# EAGLE board V1.1 (EAGLE 5.09)
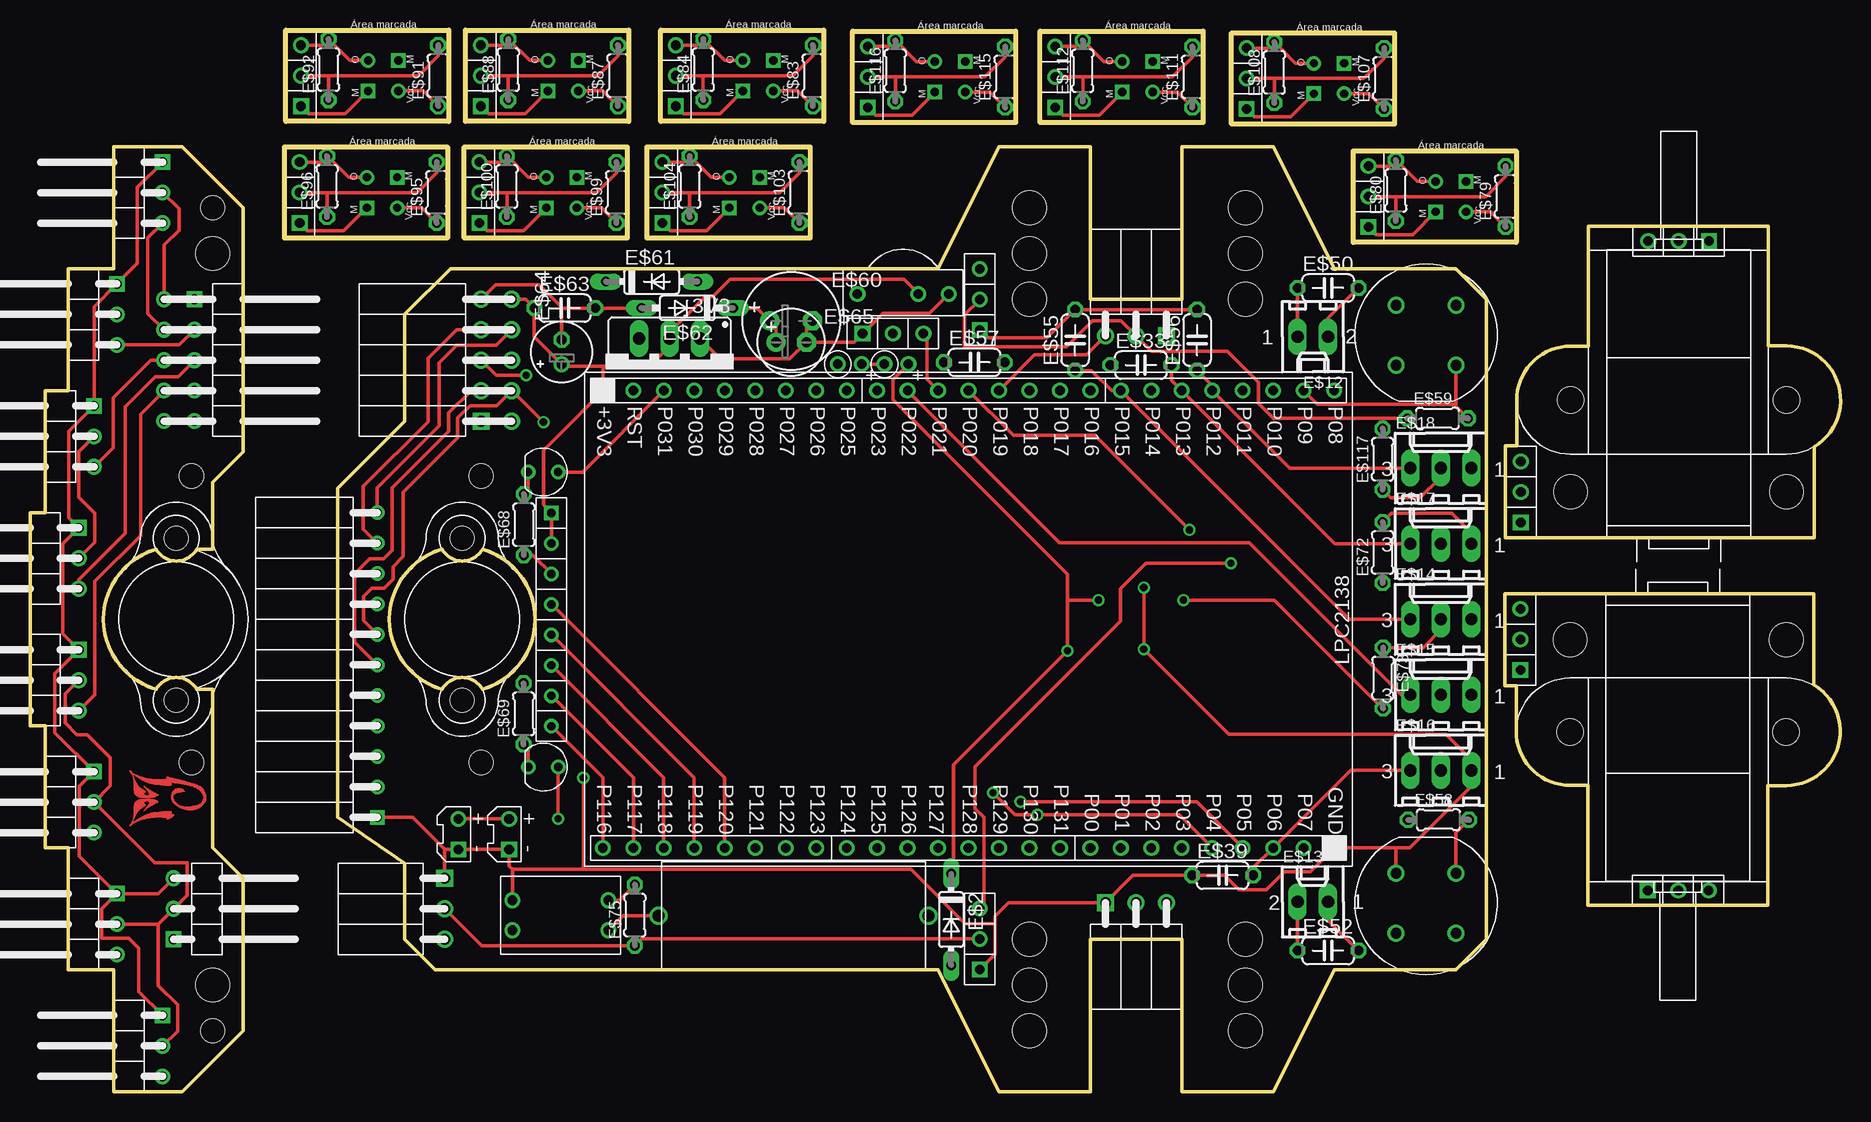
[diagram p0: board, top side]
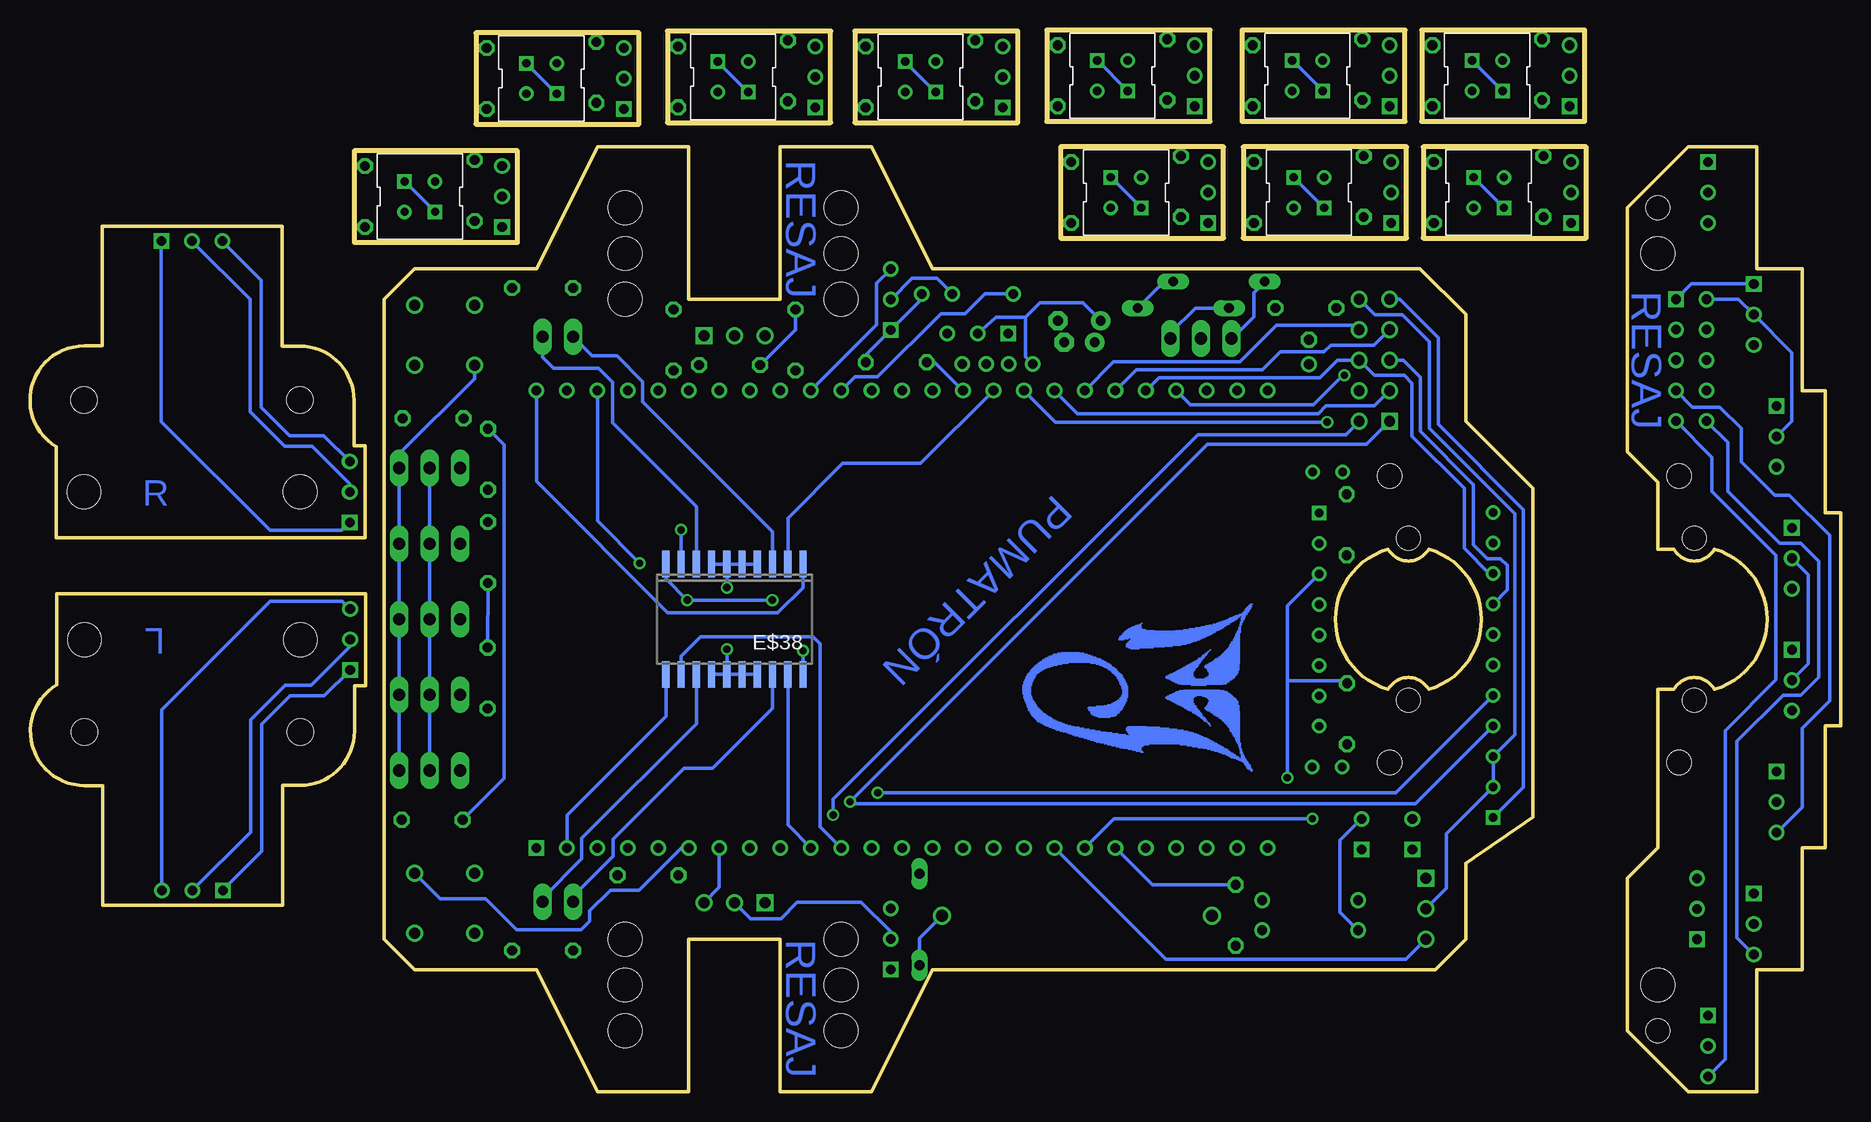
[diagram p1: board, bottom side, seen from below]

Size 150.92 x 88.47 mm. Coordinates in mm from the lower left corner, seen from the top.
Outline: 129.91,62.15 129.91,72.1 144.9,72.1 144.9,62.15 146.42,62.15 arc-149 148.73,53.77 148.73,46.14 122.98,46.14 122.98,53.81 123.92,53.81 123.92,57.62 arc-90 128.41,62.12 129.91,62.12
Outline: 129.87,25.51 129.87,15.55 144.86,15.55 144.86,25.51 146.38,25.51 arc149 148.69,33.89 148.69,41.51 122.94,41.51 122.94,33.84 123.88,33.84 123.88,30.03 arc90 128.38,25.54 129.87,25.54
Outline: 75.69,10.16 80.77,0 88.39,0 88.39,12.7 96.01,12.7 96.01,0 103.63,0 108.71,10.16 118.87,10.16 121.41,12.7 121.41,66.04 118.87,68.58 108.71,68.58 103.63,78.74 96.01,78.74 96.01,66.04 88.39,66.04 88.39,78.74 80.77,78.74 75.69,68.58 35.05,68.58 31.24,64.77 31.24,55.88 25.65,50.29 25.65,22.86 31.24,19.05 31.24,12.7 33.78,10.16 75.69,10.16
Outline: 17.78,53.34 15.24,50.8 15.24,45.21 13.89,45.21 arc-122 10.52,45.21 arc148 10.52,33.53 arc-122 13.89,33.53 15.24,33.53 15.24,20.32 17.78,17.78 17.78,5.08 12.7,0 6.98,0 6.98,10.16 3.17,10.16 3.17,20.32 1.27,20.32 1.27,30.48 0,30.48 0,48.26 1.27,48.26 1.27,58.42 3.17,58.42 3.17,68.58 6.98,68.58 6.98,78.74 12.7,78.74 17.78,73.66 17.78,53.34
Outline: 34.34,45.21 arc148 34.34,33.53 arc-122 37.72,33.53 arc148 37.72,45.21 arc-122 34.34,45.21
Outline: 110.3,70.78 110.3,78.41 123.89,78.41 123.89,70.78 110.3,70.78
Outline: 52.57,80.85 52.57,88.47 66.16,88.47 66.16,80.85 52.57,80.85
Outline: 36.31,80.85 36.31,88.47 49.9,88.47 49.9,80.85 36.31,80.85
Outline: 21.33,80.85 21.33,88.47 34.91,88.47 34.91,80.85 21.33,80.85
Outline: 21.21,71.12 21.21,78.74 34.8,78.74 34.8,71.12 21.21,71.12
Outline: 36.2,71.12 36.2,78.74 49.78,78.74 49.78,71.12 36.2,71.12
Outline: 51.44,71.12 51.44,78.74 65.02,78.74 65.02,71.12 51.44,71.12
Outline: 100.16,80.62 100.16,88.24 113.75,88.24 113.75,80.62 100.16,80.62
Outline: 84.19,80.75 84.19,88.37 97.78,88.37 97.78,80.75 84.19,80.75
Outline: 68.57,80.75 68.57,88.37 82.16,88.37 82.16,80.75 68.57,80.75
Copper layers (1*16): Top 0.035mm / dielectric 1.5mm / Bottom 0.035mm
Design rules "default": minimum track width 10mil, minimum drill 24mil, track to track 8mil, track to pad 8mil, pad to pad 8mil, via to via 8mil, smd to smd 8mil, copper to edge 40mil, drill to drill 8mil, minimum pad ring 10mil, minimum via ring 8mil, stop-mask expansion 4mil, vias tented up to drill 0mil, thermal gap 10mil
Holes 2.8 mm at 83.31,66.04 101.32,66.04 83.31,69.85 101.32,69.85 83.31,12.7 83.31,8.89 101.32,12.7 101.32,8.89 83.31,5.08 101.32,5.08 83.31,73.66 101.32,73.66 15.24,8.89 15.24,69.85 128.41,50.01 146.42,50.01 128.38,37.65 146.38,37.65
Holes 2 mm at 15.24,73.66 15.24,5.08 13.46,51.31 13.46,27.43 37.59,27.43 37.59,51.31

## Footprints (pad centres in the part's own frame; a part is rotated, then mirrored left to right if it is on the bottom)
TO220S = drill 1.016 long: 1 -2.54,-2.54; 2 0,-2.54; 3 2.54,-2.54
LPC2138 = drill 0.8 square: P$1 30.48,-10.16 | drill 0.8 round: P$2 -27.94,-10.16; P$3 -25.4,-10.16; P$4 -22.86,-10.16; P$5 -20.32,-10.16; P$6 -17.78,-10.16; P$7 -15.24,-10.16; P$8 -12.7,-10.16; P$9 -10.16,-10.16; P$10 -7.62,-10.16; P$11 -5.08,-10.16; P$12 -2.54,-10.16; P$13 0,-10.16; P$14 2.54,-10.16; P$15 5.08,-10.16; P$16 7.62,-10.16; P$17 10.16,-10.16; P$18 12.7,-10.16; P$19 15.24,-10.16; P$20 17.78,-10.16; P$21 20.32,-10.16; P$22 22.86,-10.16; P$23 25.4,-10.16; P$24 27.94,-10.16; P$25 -30.48,-10.16; P$26 30.48,27.94; P$27 27.94,27.94; P$28 25.4,27.94; P$29 22.86,27.94; P$30 20.32,27.94; P$31 17.78,27.94; P$32 15.24,27.94; P$33 12.7,27.94; P$34 10.16,27.94; P$35 7.62,27.94; P$36 5.08,27.94; P$37 2.54,27.94; P$38 0,27.94; P$39 -2.54,27.94; P$40 -5.08,27.94; P$41 -7.62,27.94; P$42 -10.16,27.94; P$43 -12.7,27.94; P$44 -15.24,27.94; P$45 -17.78,27.94; P$46 -20.32,27.94; P$47 -22.86,27.94; P$48 -25.4,27.94; P$49 -27.94,27.94; P$50 -30.48,27.94
DO35-7B = drill 0.813 long: A 3.81,0; C -3.81,0
DIODO_VERTICAL = drill 0.8 round: P$1 0,0; P$2 2,0
TIRADE3PINESHEMBRATUMBADOS = drill 0.9 round: P$1 1.27,-1.778; P$2 3.81,-1.778 | drill 0.9 square: P$3 6.35,-1.778
PULSADOR = drill 0.9 round: P$1 0,0; P$2 0,5; P$3 5,5; P$4 5,0
RUEDA_LOCA_0.375'' = hole 2: -6.75,0; 6.75,0
TSOP31238 = drill 0.8 round: P$1 1.2,1.8; P$3 6.274,1.803; P$4 8.814,1.803
CON_M_RT_ANG_2X5 = drill 0.8 round: P$1 -4.064,11.43; P$3 -1.524,8.89; P$4 -4.064,8.89; P$5 -4.064,6.35; P$6 -4.064,3.81; P$7 -4.064,1.27; P$8 -1.524,1.27; P$9 -1.524,3.81; P$10 -1.524,6.35 | drill 0.8 square: P$2 -1.524,11.43
SOPORTE_FUSIBLE = drill 1 round: P$2 -0.25,4.5; P$3 22.25,4.5
6410-02 = drill 1.016 long: 1 1.27,0; 2 -1.27,0
6410-03 = drill 1.016 long: 1 2.54,0; 2 0,0; 3 -2.54,0
TIRADE3PINES = drill 0.8 square: P$1 1.27,1.27 | drill 0.8 round: P$2 3.81,1.27; P$3 6.35,1.27
SOPORTE_EXTENDIDO_MICROMOTOR = hole 2.2: -1.5,4.5; 16.5,4.5
TIRADE11PINESTUMBADOS = drill 0.7 square: P$1 1.27,-2.032 | drill 0.7 round: P$2 3.81,-2.032; P$3 6.35,-2.032; P$4 8.89,-2.032; P$5 11.43,-2.032; P$6 13.97,-2.032; P$7 16.51,-2.032; P$8 19.05,-2.032; P$9 21.59,-2.032; P$10 24.13,-2.032; P$11 26.67,-2.032
BATERIA_LIPO = drill 0.8 square: P$1 0,0 | drill 0.8 round: P$2 2.54,0
C050-024X044 = drill 0.813 octagon: 1 -2.54,0; 2 2.54,0
CON_RT_ANG_2X5 = drill 0.9 square: P$1 1.27,-1.27 | drill 0.9 round: P$2 3.81,-1.27; P$3 6.35,-1.27; P$4 8.89,-1.27; P$5 11.43,-1.27; P$6 11.43,-3.81; P$7 8.89,-3.81; P$8 6.35,-3.81; P$9 3.81,-3.81; P$10 1.27,-3.81
TIRADE8PINES = drill 0.7 square: P$1 1.27,1.27 | drill 0.7 round: P$2 3.81,1.27; P$3 6.35,1.27; P$4 8.89,1.27; P$5 11.43,1.27; P$6 13.97,1.27; P$7 16.51,1.27; P$8 19.05,1.27
SO20W = smd 0.6 x 2.2: 1 -5.715,-4.6; 2 -4.445,-4.6; 3 -3.175,-4.6; 4 -1.905,-4.6; 5 -0.635,-4.6; 6 0.635,-4.6; 7 1.905,-4.6; 8 3.175,-4.6; 9 4.445,-4.6; 10 5.715,-4.6; 11 5.715,4.6; 12 4.445,4.6; 13 3.175,4.6; 14 1.905,4.6; 15 0.635,4.6; 16 -0.635,4.6; 17 -1.905,4.6; 18 -3.175,4.6; 19 -4.445,4.6; 20 -5.715,4.6
TIRADE3PINESTUMBADOS = drill 0.8 round: P$1 1.27,-1.524; P$2 3.81,-1.524 | drill 0.8 square: P$3 6.35,-1.524
0204/5 = drill 0.813 octagon: 1 -2.54,0; 2 2.54,0
E3,5-8 = drill 0.813 pad 1.6 round: + -1.778,0 | drill 0.813 pad 1.6 octagon: - 1.778,0
DO35Z7 = drill 0.813 long: A 3.81,0; C -3.81,0
E2-5 = drill 0.813 pad 1.27 round: + -1.016,0 | drill 0.813 pad 1.27 octagon: - 1.016,0
E2,5-6 = drill 0.813 pad 1.6 round: + -1.27,0 | drill 0.813 pad 1.6 octagon: - 1.27,0
LED = drill 0.7 round: P$1 0,1.25; P$2 0,-1.25
MICROINTERRUPTOR_DOBLE = drill 0.8 round: P$1 1,2; P$2 1,4.5; P$3 9,4.5; P$4 9,2
CNY70 = drill 0.7 square: P$1 2.54,0; P$2 0,2.54 | drill 0.7 round: P$3 0,0; P$5 2.54,2.54

## Placement (x,y rotation side)
3V3  [TO220S]  53.31,60.22 180 top
E$1  [LPC2138]  78.23,30.48 0 top
E$2  [DO35-7B]  76.78,14.35 270 top
E$3  [DIODO_VERTICAL]  71.22,60.63 0 top
E$4  [TIRADE3PINESHEMBRATUMBADOS]  32.79,11.43 90 top
E$5  [MICROMOTOR]  131.44,46.14 0 top
E$6  [PULSADOR]  113.87,13.21 0 top
E$7  [PULSADOR]  118.87,65.53 180 top
E$8  [RUEDA_LOCA_0.375'']  36.02,39.37 90 top
E$9  [TSOP31238]  67.77,64.68 0 top
E$10  [CON_M_RT_ANG_2X5]  15.24,54.61 0 top
E$11  [SOPORTE_FUSIBLE]  52.66,10.16 0 top
E$12  [6410-02]  106.93,62.92 180 top
E$13  [6410-02]  106.93,15.82 0 top
E$14  [6410-03]  117.6,39.37 0 top
E$15  [6410-03]  117.6,33.07 0 top
E$16  [6410-03]  117.6,26.77 0 top
E$17  [6410-03]  117.6,45.67 0 top
E$18  [6410-03]  117.6,51.97 0 top
E$19  [TIRADE3PINES]  125.54,46.17 90 top
E$21  [SOPORTE_EXTENDIDO_MICROMOTOR]  129.91,53.13 0 top
E$24  [TIRADE11PINESTUMBADOS]  26.92,21.59 90 top
E$25  [BATERIA_LIPO]  35.7,20.19 90 top
E$26  [BATERIA_LIPO]  39.94,20.19 90 top
E$27  [TIRADE3PINES]  141.24,72.15 180 top
E$29  [TIRADE3PINES]  80.44,62.2 90 top
E$30  [TIRADE3PINES]  68.12,61.9 0 top
E$31  [MICROMOTOR]  143.36,41.54 180 top
E$32  [TIRADE3PINES]  80.44,8.92 90 top
E$33  [C050-024X044]  92.61,60.55 0 top
E$34  [TIRADE3PINESHEMBRATUMBADOS]  88.39,64.77 0 top
E$35  [CON_RT_ANG_2X5]  36.32,54.61 90 top
E$36  [TIRADE8PINES]  42.19,49.5 270 top
E$37  [TIRADE3PINESHEMBRATUMBADOS]  96.01,13.97 180 top
E$38  [SO20W]  92.2,39.37 180 bottom
E$39  [C050-024X044]  99.42,18.03 0 top
E$40  [TIRADE3PINESTUMBADOS]  2.54,40.64 90 top
E$41  [TIRADE3PINESTUMBADOS]  2.54,30.48 90 top
E$42  [TIRADE3PINESTUMBADOS]  3.81,20.32 90 top
E$43  [TIRADE3PINESTUMBADOS]  3.81,50.8 90 top
E$44  [TIRADE3PINESTUMBADOS]  5.71,60.96 90 top
E$45  [TIRADE3PINESTUMBADOS]  5.71,10.16 90 top
E$46  [TIRADE3PINESTUMBADOS]  9.52,71.12 90 top
E$47  [TIRADE3PINESTUMBADOS]  9.52,0 90 top
E$48  [TIRADE3PINESTUMBADOS]  13.49,19.05 270 top
E$49  [RUEDA_LOCA_0.375'']  12.2,39.37 90 top
E$50  [C050-024X044]  108.2,66.98 0 top
E$51  [SOPORTE_EXTENDIDO_MICROMOTOR]  144.89,34.48 180 top
E$52  [C050-024X044]  108.2,11.76 0 top
E$53  [TIRADE3PINES]  125.51,33.87 90 top
E$54  [TIRADE3PINES]  133.58,15.5 0 top
E$55  [C050-024X044]  87.12,62.64 90 top
E$56  [C050-024X044]  97.28,62.64 90 top
E$57  [C050-024X044]  78.71,60.78 0 top
E$58  [0204/5]  117.4,22.66 0 top
E$59  [0204/5]  117.32,56.11 0 top
E$60  [E3,5-8]  63.45,64.24 0 top
E$61  [DO35-7B]  51.82,67.51 0 top
E$62  [DO35Z7]  54.79,65.3 180 top
E$63  [C050-024X044]  44.58,65.3 0 top
E$64  [E2-5]  44.32,61.65 90 top
E$65  [E2,5-6]  63.45,62.46 0 top
E$66  [LED]  42.77,51.64 90 top
E$67  [LED]  42.78,27.05 90 top
E$68  [0204/5]  41.17,47.25 90 top
E$69  [0204/5]  41.14,31.49 90 top
E$70  [IMAGEN_MJ]  10.41,24.43 90 top
E$71  [IMAGEN_MJ_GRANDE]  54.28,33.71 270 bottom
E$72  [0204/5]  112.75,44.93 90 top
E$73  [0204/5]  112.78,34.47 270 top
E$74  [MICROINTERRUPTOR_DOBLE]  39.22,11.46 0 top
E$75  [0204/5]  50.42,14.71 90 top
E$76  [DIODO_VERTICAL]  67.34,60.63 0 top
E$77  [CNY70]  119.7,73.33 90 top
E$78  [TIRADE3PINES]  112.84,70.78 90 top
E$79  [0204/5]  123,74.59 90 top
E$80  [0204/5]  113.85,75.1 90 top
E$81  [TIRADE3PINES]  55.11,80.85 90 top
E$82  [CNY70]  61.97,83.39 90 top
E$83  [0204/5]  65.27,84.66 90 top
E$84  [0204/5]  56.12,85.17 90 top
E$85  [TIRADE3PINES]  38.85,80.85 90 top
E$86  [CNY70]  45.71,83.39 90 top
E$87  [0204/5]  49.01,84.66 90 top
E$88  [0204/5]  39.87,85.17 90 top
E$89  [TIRADE3PINES]  23.87,80.85 90 top
E$90  [CNY70]  30.72,83.39 90 top
E$91  [0204/5]  34.03,84.66 90 top
E$92  [0204/5]  24.88,85.17 90 top
E$93  [TIRADE3PINES]  23.75,71.12 90 top
E$94  [CNY70]  30.61,73.66 90 top
E$95  [0204/5]  33.91,74.93 90 top
E$96  [0204/5]  24.76,75.44 90 top
E$97  [TIRADE3PINES]  38.73,71.12 90 top
E$98  [CNY70]  45.59,73.66 90 top
E$99  [0204/5]  48.89,74.93 90 top
E$100  [0204/5]  39.75,75.44 90 top
E$101  [TIRADE3PINES]  53.97,71.12 90 top
E$102  [CNY70]  60.83,73.66 90 top
E$103  [0204/5]  64.13,74.93 90 top
E$104  [0204/5]  54.99,75.44 90 top
E$105  [TIRADE3PINES]  102.7,80.62 90 top
E$106  [CNY70]  109.56,83.16 90 top
E$107  [0204/5]  112.86,84.43 90 top
E$108  [0204/5]  103.72,84.94 90 top
E$109  [TIRADE3PINES]  86.73,80.75 90 top
E$110  [CNY70]  93.59,83.29 90 top
E$111  [0204/5]  96.89,84.56 90 top
E$112  [0204/5]  87.75,85.07 90 top
E$113  [TIRADE3PINES]  71.11,80.75 90 top
E$114  [CNY70]  77.97,83.29 90 top
E$115  [0204/5]  81.27,84.56 90 top
E$116  [0204/5]  72.13,85.07 90 top
E$117  [0204/5]  112.75,52.7 90 top

## Library data of the parts
3V3 = v-reg
E$1 E$3-E$11 E$19 E$21 E$24-E$27 E$29-E$32 E$34-E$37 E$40-E$49 E$51 E$53 E$54 E$66 E$67 E$70 E$71 E$74 E$76-E$78 E$81 E$82 E$85 E$86 E$89 E$90 E$93 E$94 E$97 E$98 E$101 E$102 E$105 E$106 E$109 E$110 E$113 E$114 = Robot
E$2 E$61 E$62 = diode
E$12-E$18 = con-molex
E$33 E$39 E$50 E$52 E$55-E$60 E$63-E$65 E$68 E$69 E$72 E$73 E$75 E$79 E$80 E$83 E$84 E$87 E$88 E$91 E$92 E$95 E$96 E$99 E$100 E$103 E$104 E$107 E$108 E$111 E$112 E$115-E$117 = resistor
E$38 = smd-ipc

## Nets
S$1: E$1.P$8 E$4.P$1
S$2: E$1.P$35 E$29.P$3
S$3: E$10.P$10 E$40.P$1
S$4: E$10.P$8 E$47.P$1
S$5: E$10.P$4 E$46.P$1
S$6: E$10.P$3 E$44.P$1
S$7: E$10.P$5 E$43.P$1
S$8: E$10.P$6 E$41.P$1
S$9: E$10.P$1 E$40.P$2 E$41.P$2 E$42.P$2 E$43.P$2 E$44.P$2 E$45.P$2 E$46.P$2 E$47.P$2 E$48.P$2
S$10: E$10.P$9 E$42.P$1
S$11: E$10.P$7 E$45.P$1
S$12: E$19.P$3 E$27.P$3
S$13: E$19.P$2 E$27.P$2
S$14: E$10.P$2 E$40.P$3 E$41.P$3 E$42.P$3 E$43.P$3 E$44.P$3 E$45.P$3 E$46.P$3 E$47.P$3 E$48.P$1
S$15: E$19.P$1 E$27.P$1
S$16: E$11.P$2 E$74.P$4
S$17: E$13.1 E$38.13 E$52.2
S$18: E$1.P$26 E$38.1
S$19: 3V3.3 E$61.C
S$20: E$1.P$25 E$36.P$8
S$21: E$1.P$2 E$36.P$7
S$22: E$53.P$3 E$54.P$3
S$23: E$53.P$2 E$54.P$2
S$24: E$53.P$1 E$54.P$1
S$25: E$1.P$3 E$36.P$6
S$26: E$1.P$4 E$36.P$5
S$27: E$1.P$5 E$36.P$4
S$28: E$1.P$36 E$9.P$1
S$29: E$1.P$6 E$74.P$3 E$75.2
S$30: E$1.P$37 E$34.P$1
S$31: E$1.P$39 E$30.P$3
S$32: E$2.A E$11.P$3
S$33: E$13.2 E$38.18 E$52.1
S$34: E$1.P$33 E$14.3 E$55.1
S$35: E$1.P$16 E$38.19
S$36: E$1.P$22 E$24.P$4 E$35.P$1
S$37: E$1.P$21 E$24.P$5 E$35.P$10
S$38: E$1.P$20 E$6.P$3 E$58.2
S$39: E$1.P$19 E$37.P$1
S$40: E$1.P$27 E$7.P$2 E$59.2
S$41: E$1.P$30 E$18.3 E$56.1
S$42: E$1.P$31 E$17.3 E$33.2
S$43: E$1.P$28 E$32.P$3
S$44: E$1.P$48 E$66.P$2
S$45: E$1.P$43 E$24.P$6 E$35.P$2
S$46: E$1.P$42 E$24.P$7 E$35.P$9
S$47: E$1.P$47 E$24.P$8 E$35.P$3
S$48: E$1.P$46 E$24.P$9 E$35.P$8
S$49: E$1.P$45 E$24.P$10 E$35.P$4
S$50: E$1.P$44 E$24.P$11 E$35.P$7
S$51: E$1.P$23 E$16.3 E$39.2
S$52: E$30.P$2 E$60.+ E$61.A E$62.C E$65.+ E$76.P$1
S$53: E$12.1 E$38.3 E$50.1
S$54: E$12.2 E$38.8 E$50.2
S$55: E$1.P$24 E$38.11
S$56: E$2.C E$3.P$2 E$38.10 E$38.20 E$73.2
S$58: E$3.P$1 E$76.P$2
S$59: E$1.P$38 E$38.9
S$60: E$1.P$41 E$38.2
S$61: E$1.P$15 E$38.12
S$62: E$66.P$1 E$68.2
S$63: E$67.P$1 E$69.1
S$64: 3V3.1 E$1.P$1 E$4.P$3 E$6.P$2 E$7.P$3 E$9.P$4 E$14.1 E$15.1 E$16.1 E$17.1 E$18.1 E$24.P$1 E$25.P$1 E$26.P$1 E$29.P$1 E$30.P$1 E$32.P$1 E$33.1 E$34.P$3 E$35.P$5 E$36.P$3 E$37.P$3 E$38.4 E$38.5 E$38.6 E$38.7 E$38.14 E$38.15 E$38.16 E$38.17 E$39.1 E$55.2 E$56.2 E$57.2 E$60.- E$62.A E$63.2 E$64.- E$65.- E$68.1 E$69.2 E$72.2 E$74.P$2
S$65: E$1.P$40 E$15.3 E$57.1
S$66: E$77.P$1 E$77.P$2 E$78.P$1
S$67: E$25.P$2 E$26.P$2 E$74.P$1
S$68: E$14.2 E$15.2 E$16.2 E$17.2 E$18.2 E$72.1 E$73.1 E$117.1
S$70: E$77.P$3 E$79.1
S$71: E$78.P$2 E$79.2 E$80.1
S$72: E$77.P$5 E$78.P$3 E$80.2
S$73: E$81.P$1 E$82.P$1 E$82.P$2
S$74: E$82.P$3 E$83.1
S$75: E$81.P$3 E$82.P$5 E$84.2
S$76: E$81.P$2 E$83.2 E$84.1
S$77: E$85.P$1 E$86.P$1 E$86.P$2
S$78: E$86.P$3 E$87.1
S$79: E$85.P$3 E$86.P$5 E$88.2
S$80: E$85.P$2 E$87.2 E$88.1
S$81: E$89.P$1 E$90.P$1 E$90.P$2
S$82: E$90.P$3 E$91.1
S$83: E$89.P$3 E$90.P$5 E$92.2
S$84: E$89.P$2 E$91.2 E$92.1
S$85: E$93.P$1 E$94.P$1 E$94.P$2
S$86: E$94.P$3 E$95.1
S$87: E$93.P$3 E$94.P$5 E$96.2
S$88: E$93.P$2 E$95.2 E$96.1
S$89: E$97.P$1 E$98.P$1 E$98.P$2
S$90: E$98.P$3 E$99.1
S$91: E$97.P$3 E$98.P$5 E$100.2
S$92: E$97.P$2 E$99.2 E$100.1
S$93: E$101.P$1 E$102.P$1 E$102.P$2
S$94: E$102.P$3 E$103.1
S$95: E$101.P$3 E$102.P$5 E$104.2
S$96: E$101.P$2 E$103.2 E$104.1
S$97: E$105.P$1 E$106.P$1 E$106.P$2
S$98: E$106.P$3 E$107.1
S$99: E$105.P$3 E$106.P$5 E$108.2
S$100: E$105.P$2 E$107.2 E$108.1
S$101: E$109.P$1 E$110.P$1 E$110.P$2
S$102: E$110.P$3 E$111.1
S$103: E$109.P$3 E$110.P$5 E$112.2
S$104: E$109.P$2 E$111.2 E$112.1
S$105: E$113.P$1 E$114.P$1 E$114.P$2
S$106: E$114.P$3 E$115.1
S$107: E$113.P$3 E$114.P$5 E$116.2
S$108: E$113.P$2 E$115.2 E$116.1
S$109: 3V3.2 E$1.P$50 E$4.P$2 E$9.P$3 E$24.P$2 E$24.P$3 E$29.P$2 E$32.P$2 E$34.P$2 E$35.P$6 E$36.P$1 E$36.P$2 E$37.P$2 E$58.1 E$59.1 E$63.1 E$64.+ E$75.1 E$117.2
S$113: E$1.P$7 E$67.P$2

## Tracks (layer width: path | path; a pad name or v marks a point on that pad's centre or on a via)
S$1
  Bottom 0.305: E$4.P$1 36.25,11.02 56.24,11.02 E$1.P$8
S$2
  Bottom 0.305: E$29.P$3 80.37,67.36 80.37,63.91 E$1.P$35
S$3
  Top 0.305: E$40.P$1 4.06,42.67 7.92,46.53 7.92,57.07 10.44,59.59 12.34,59.59 E$10.P$10
S$4
  Bottom 0.305: E$47.P$1 9.6,2.72 9.6,30.1 5.38,34.31 5.38,44.7 10.72,50.04 10.72,52.88 E$10.P$8
S$5
  Top 0.305: E$10.P$4 9.83,64.85 9.83,71.17 E$46.P$1
S$6
  Top 0.305: E$44.P$1 12.45,62.23 E$10.P$3
S$7
  Top 0.305: E$43.P$1 6.93,53.67 6.93,57.84 10.06,60.96 E$10.P$5
S$8
  Top 0.305: E$41.P$1 5.41,33.1 5.41,42.52 9.22,46.33 9.22,56.46 E$10.P$6
S$9
  Top 0.305: E$47.P$2 12.29,5.05 12.29,7.24 10.69,8.84 10.69,13.97 | 10.69,13.97 E$45.P$2 | 10.69,13.97 E$48.P$2 13.11,16.38 13.11,19.07 10.39,19.07 E$42.P$2 6.71,25.5 6.71,27.81 4.77,29.74 3.91,29.74 2.92,30.73 2.92,33.15 E$41.P$2 | E$40.P$2 5.41,45.8 5.41,48.18 4.06,49.53 4.06,53.34 E$43.P$2 | E$46.P$2 12.42,73.56 12.42,71.81 11.18,70.56 E$10.P$1
  Bottom 0.305: E$10.P$1 8.51,66.04 E$44.P$2 4.06,61.59 4.06,55.88 E$43.P$2 | E$41.P$2 2.69,35.66 2.69,43.08 E$40.P$2
S$10
  Bottom 0.305: E$42.P$1 3.2,23.72 3.2,30.3 0.91,32.59 0.91,46.36 4.27,49.71 5.49,49.71 8.28,52.5 8.28,55.27 10.06,57.05 12.34,57.05 E$10.P$9
S$11
  Bottom 0.305: E$45.P$1 8.64,12.83 8.64,29.18 4.77,33.05 3.33,33.05 1.83,34.54 1.83,44.22 3.3,45.69 5.08,45.69 9.42,50.04 9.42,54.13 E$10.P$7
S$12
  Bottom 0.305: E$27.P$3 131.64,67.63 131.64,57.04 129.28,54.68 126.43,54.68 E$19.P$3
S$13
  Bottom 0.305: E$27.P$2 132.58,66.03 132.58,56.66 129.71,53.79 127.4,53.79 124.27,50.66 E$19.P$2
S$14
  Top 0.305: E$47.P$3 9.07,8.33 9.07,11.94 8.23,12.78 5.99,12.78 5.99,15.26 E$45.P$3 | E$48.P$1 10.69,16.51 E$45.P$3 | E$45.P$3 4.11,19.63 4.11,25.45 E$42.P$3 2.08,29.92 2.08,34.85 E$41.P$3 2.72,38.18 2.72,45.64 E$40.P$3 3.23,47.83 3.23,55.04 E$43.P$3 5.33,65.41 E$44.P$3 7.24,67.33 8.94,69.04 8.94,75.36 E$46.P$3
  Bottom 0.305: E$44.P$3 12.45,67.31 E$10.P$2
S$15
  Bottom 0.305: E$27.P$1 139.97,55.85 130.9,46.78 124.93,46.78 E$19.P$1
S$16
  Top 0.305: E$74.P$4 49.42,14.66 E$11.P$2
S$17
  Top 0.305: E$13.1 108.2,14.3 E$52.2
  Bottom 0.305: E$13.1 108.2,16.13 104.93,19.41 104.93,21.11 95.38,30.66 E$38.13
S$18
  Bottom 0.305: E$38.1 86.49,42.01 88.59,39.9 97.77,39.9 108.71,50.85 E$1.P$26
S$19
  Bottom 0.305: E$61.C 48.92,66.6 48.92,64.59 50.75,62.76 3V3.3
S$20
  Top 0.305: E$36.P$8 47.75,26.16 E$1.P$25
S$21
  Top 0.305: E$36.P$7 50.29,26.16 E$1.P$2
S$22
  Bottom 0.305: E$54.P$3 139.93,31.84 130.89,40.88 124.9,40.88 E$53.P$3
S$23
  Bottom 0.305: E$54.P$2 132.54,21.62 132.54,31 129.67,33.87 127.47,33.87 124.23,37.1 E$53.P$2
S$24
  Bottom 0.305: E$54.P$1 131.6,20.02 131.6,30.62 129.24,32.98 126.39,32.98 E$53.P$1
S$25
  Top 0.305: E$36.P$6 52.83,26.16 E$1.P$3
S$26
  Top 0.305: E$36.P$5 55.37,26.16 E$1.P$4
S$27
  Top 0.305: E$36.P$4 57.91,26.16 E$1.P$5
S$28
  Bottom 0.305: E$1.P$36 82.17,59.56 80.29,59.56 75.01,64.85 72.97,64.85 71.34,66.48 E$9.P$1
S$29
  Top 0.305: E$74.P$3 49.13,15.95 E$75.2
  Bottom 0.305: E$75.2 57.38,17.25 E$1.P$6
S$30
  Top 0.305: E$1.P$37 83.74,61.39 88.06,61.39 E$34.P$1
S$31
  Top 0.305: E$30.P$3 74.75,62.89 74.75,59.36 E$1.P$39
S$32
  Bottom 0.305: E$11.P$3 76.78,12.79 E$2.A
S$33
  Top 0.305: E$52.1 E$13.2
  Bottom 0.305: E$13.2 105.66,16.31 102.34,19.63 102.34,21.03 96.42,26.95 94.03,26.95 89.03,31.95 E$38.18
S$34
  Top 0.305: E$55.1 88.49,60.1 90.17,58.42 E$1.P$33 109.98,39.37 E$14.3
S$35
  Bottom 0.305: E$1.P$16 87.76,22.23 E$38.19
S$36  (via drill 0.6)
  Top 0.305: E$1.P$22 97.26,24.16 v82.57,24.16
  Bottom 0.305: E$35.P$1 39.52,53.95 52.78,53.95 v82.57,24.16 82.4,23.98 35.46,23.98 E$24.P$4
S$37  (via drill 0.6)
  Top 0.305: E$1.P$21 95.81,23.06 v83.97,23.06 82.12,23.06 v80.26,24.92
  Bottom 0.305: v83.97,23.06 83.97,24.36 53.57,54.76 41.25,54.76 E$35.P$10 | E$24.P$5 37.06,24.92 v80.26,24.92
S$38
  Top 0.305: E$6.P$3 118.87,21.59 E$58.2
  Bottom 0.305: E$1.P$20 96.62,20.32 100.15,16.79 102.54,16.79 104.27,15.06 104.27,14.22 104.98,13.51 110.36,13.51 112.93,16.08 116.74,16.08 E$6.P$3
S$39
  Bottom 0.305: E$37.P$1 93.47,17.02 E$1.P$19
S$40
  Top 0.305: 118.87,57.35 E$7.P$2 | 118.87,57.35 118.8,57.28 107.31,57.28 E$1.P$27 | E$59.2 118.87,57.1 118.87,57.35
S$41
  Top 0.305: E$18.3 105,51.97 E$1.P$30 98.55,58.83 E$56.1
S$42
  Top 0.305: E$17.3 108.76,45.67 E$1.P$31 95.15,59.28 E$33.2
S$43  (via drill 0.6)
  Top 0.305: v100.1,44.04 93.04,44.04 90.91,41.91 90.91,39.22 78.78,27.09 78.78,23.58 79.5,22.86 79.5,15.6 E$32.P$3
  Bottom 0.305: E$1.P$28 103.63,47.57 v100.1,44.04
S$44
  Top 0.305: E$66.P$2 46.05,51.64 E$1.P$48
S$45
  Top 0.305: E$24.P$6 27.05,37.47 27.05,43.16 28.32,44.42 29.49,44.42 30.2,45.14 30.2,50.32 34.9,55.02 34.9,56.57 36.75,58.42 E$35.P$2
  Bottom 0.305: E$1.P$43 63.63,56.52 43.54,56.52 42.9,57.15 38.86,57.15 E$35.P$2
S$46  (via drill 0.6)
  Top 0.305: E$24.P$7 27.81,39.24 27.81,41.27 28.5,41.96 29.51,41.96 30.25,42.7 30.25,43.76 31.09,44.6 31.09,49.94 35.66,54.51 35.66,56.16 36.68,57.17 38.89,57.17 E$35.P$9 40.18,58.42 v42.8,55.8
  Bottom 0.305: E$1.P$42 65.46,55.8 v42.8,55.8
S$47  (via drill 0.6)
  Top 0.305: v41.35,59.72 38.84,59.72 E$35.P$3
  Bottom 0.305: E$35.P$3 36.45,60.96 35.03,59.54 35.03,55.02 30.61,50.6 30.61,45.59 29.44,44.42 28.35,44.42 27.79,43.87 27.79,41.81 E$24.P$8 | E$1.P$47 54.2,57.25 43.94,57.25 41.48,59.72 v41.35,59.72
S$48
  Bottom 0.305: E$24.P$9 29.26,43.18 31.37,45.29 31.37,50.27 35.74,54.64 35.74,59.05 36.37,59.69 38.86,59.69 E$35.P$8 41.96,60.96 43.41,59.51 56.82,59.51 E$1.P$46
S$49
  Top 0.305: E$24.P$10 27.79,46.89 27.79,50.44 33.17,55.83 33.17,61.11 35.56,63.5 E$35.P$4
  Bottom 0.305: E$35.P$4 38.89,62.2 42.49,62.2 43.05,61.65 46.71,61.65 48.18,60.17 58.7,60.17 E$1.P$45
S$50
  Top 0.305: E$24.P$11 28.96,50.34 34.11,55.5 34.11,60.76 35.56,62.2 38.84,62.2 E$35.P$7
  Bottom 0.305: E$1.P$44 60.6,60.81 50.09,60.81 47.04,63.86 40.49,63.86 E$35.P$7
S$51
  Top 0.305: E$39.2 101.96,18.64 E$1.P$23 110.08,26.77 E$16.3
S$52
  Top 0.305: E$65.+ 62.18,63.73 E$60.+ 60.6,65.3 E$62.C
  Bottom 0.305: E$30.P$2 70.41,64.52 67.94,64.52 | 67.94,64.52 66.73,65.73 63.17,65.73 E$60.+ | E$61.A 56.39,67.51 E$62.C | E$76.P$1 67.94,61.24 67.94,64.52
S$53
  Top 0.305: E$12.1 E$50.1
  Bottom 0.305: E$12.1 104.06,61.32 102.01,61.32 99.85,59.16 99.85,57.48 89.03,46.66 E$38.3
S$54
  Top 0.305: E$50.2 108.2,64.44 E$12.2
  Bottom 0.305: E$12.2 108.2,61.21 107.26,60.27 103.53,60.27 102.36,59.11 102.36,55.73 95.38,48.74 E$38.8
S$55
  Bottom 0.305: E$1.P$24 106.17,23.04 97.92,31.29 E$38.11
S$56  (via drill 0.6)
  Top 0.305: E$3.P$2 71.93,59.34 71.93,57.66 86.49,43.1 86.49,40.97 | 86.49,40.97 v89.05,40.97 | 86.49,40.97 v86.49,36.75 76.99,27.25 76.99,18.36 E$2.C | E$73.2 103.73,40.97 v96.14,40.97
  Bottom 0.305: E$38.10 97.92,42.75 v96.14,40.97 v89.05,40.97 | v86.49,36.75 E$38.20
S$58
  Top 0.305: E$76.P$2 E$3.P$1
S$59  (via drill 0.6)
  Top 0.305: v96.65,46.81 88.77,54.69 81.97,54.69 E$1.P$38
  Bottom 0.305: v96.65,46.81 E$38.9
S$60
  Bottom 0.305: E$1.P$41 76.68,52.35 83.19,52.35 87.76,47.78 E$38.2
S$61
  Bottom 0.305: 96.62,34.75 E$38.12 96.65,36.27 95.02,37.9 85.67,37.9 85.09,37.31 85.09,22.1 E$1.P$15
S$62
  Top 0.305: E$68.2 41.52,50.14 E$66.P$1
S$63
  Top 0.305: E$69.1 41.53,28.56 E$67.P$1
S$64  (via drill 0.6)
  Top 0.305: E$34.P$3 94.74,65.15 94.72,65.18 | 94.72,65.18 E$56.2 | 94.72,65.18 E$55.2 84.76,62.81 79.83,62.81 E$29.P$1 | v92.84,42.01 v92.84,36.88 99.92,29.79 118.01,29.79 120.14,27.66 E$16.1 120.14,25.45 115.01,20.32 113.87,20.32 | E$17.1 120.14,46.58 118.52,48.21 113.49,48.21 E$72.2 | E$9.P$4 74.97,64.87 71.09,64.87 E$30.P$1 68.68,62.46 E$65.- | E$60.- 64.72,63.73 E$65.- | 113.87,20.32 E$6.P$2 | E$65.- 63.32,61.06 57.53,61.06 55.85,62.74 3V3.1 | 113.87,20.32 E$1.P$1 106.73,18.34 104.57,18.34 103.05,16.81 100.79,16.81 99.57,18.03 E$39.1 91.95,18.03 E$37.P$3 81.56,15.75 80.44,14.63 80.44,13.99 | E$63.2 47.07,65.3 | E$63.2 E$62.A | E$64.- 44.32,65.23 44.4,65.3 | 44.4,65.3 E$63.2 | E$68.1 41.9,44.71 E$36.P$3 | 44.4,65.3 42.44,67.26 38.81,67.26 E$35.P$5 | E$32.P$1 80.44,11.45 80.44,13.99 | 80.44,13.99 77.95,13.99 73.43,18.52 46.13,18.52 | v46.13,26.16 46.13,18.52 | 40.22,18.52 46.13,18.52 | 40.22,18.52 E$74.P$2 | 40.22,18.52 39.93,18.8 E$26.P$1 E$25.P$1 34.57,20.19 | E$24.P$1 31.9,22.86 34.57,20.19 | E$4.P$3 34.57,20.19
  Bottom 0.305: E$33.1 87.12,63.5 E$55.2 | E$38.4 E$38.5 E$38.6 | E$7.P$3 113.87,59.43 120.14,53.16 E$18.1 E$17.1 E$14.1 E$15.1 E$16.1 | E$38.6 E$38.7 | E$38.17 E$38.16 E$38.15 | E$38.15 E$38.14 | v92.84,42.01 E$38.6 | E$57.2 81.25,61.39 E$29.P$1 76.59,66.06 E$9.P$4 | v92.84,36.88 E$38.15 | 3V3.1 55.85,63.25 53.8,65.3 E$62.A | E$69.2 41.35,34.24 46.13,34.24 | E$36.P$3 46.13,40.49 46.13,34.24 | E$35.P$5 36.73,66.04 33.53,62.84 33.53,55.6 26.44,48.51 26.44,25.38 E$24.P$1 | v46.13,26.16 46.13,34.24
S$65
  Top 0.305: E$15.3 114.32,33.07 101.65,45.75 85.83,45.75 E$1.P$40
  Bottom 0.305: E$1.P$40 75.51,60.78 E$57.1
S$66
  Top 0.305: E$77.P$2 115.25,71.42 112.2,71.42 E$78.P$1
  Bottom 0.305: E$77.P$2 E$77.P$1
S$67
  Top 0.305: E$25.P$2 E$26.P$2
  Bottom 0.305: E$26.P$2 41.73,20.94 41.73,14.97 E$74.P$1
S$68
  Top 0.305: E$73.1 116.13,37.01 117.6,38.48 E$14.2 | E$117.1 113.44,49.48 115.88,49.48 117.6,51.21 E$18.2
  Bottom 0.305: E$73.1 E$72.1 | E$18.2 E$17.2 E$14.2 E$15.2 E$16.2
S$70
  Top 0.305: E$77.P$3 121.73,73.33 E$79.1
S$71
  Top 0.305: E$79.2 123,76.25 121.35,74.59 113.85,74.59 | 111.82,74.59 E$78.P$2 113.85,74.59 | E$80.1 113.85,74.59
S$72
  Top 0.305: E$78.P$3 113.35,77.14 E$80.2 115.63,75.86 E$77.P$5
S$73
  Top 0.305: E$82.P$2 57.52,81.49 54.47,81.49 E$81.P$1
  Bottom 0.305: E$82.P$2 E$82.P$1
S$74
  Top 0.305: E$82.P$3 64,83.39 E$83.1
S$75
  Top 0.305: E$81.P$3 55.62,87.2 E$84.2 57.9,85.93 E$82.P$5
S$76
  Top 0.305: E$83.2 65.27,86.31 63.62,84.66 56.12,84.66 | 54.09,84.66 E$81.P$2 56.12,84.66 | E$84.1 56.12,84.66
S$77
  Top 0.305: E$86.P$2 41.27,81.49 38.22,81.49 E$85.P$1
  Bottom 0.305: E$86.P$2 E$86.P$1
S$78
  Top 0.305: E$86.P$3 47.74,83.39 E$87.1
S$79
  Top 0.305: E$85.P$3 39.36,87.2 E$88.2 41.65,85.93 E$86.P$5
S$80
  Top 0.305: E$87.2 49.01,86.31 47.36,84.66 39.87,84.66 | 37.84,84.66 E$85.P$2 39.87,84.66 | E$88.1 39.87,84.66
S$81
  Top 0.305: E$90.P$2 26.28,81.49 23.23,81.49 E$89.P$1
  Bottom 0.305: E$90.P$2 E$90.P$1
S$82
  Top 0.305: E$90.P$3 32.76,83.39 E$91.1
S$83
  Top 0.305: E$89.P$3 24.37,87.2 E$92.2 26.66,85.93 E$90.P$5
S$84
  Top 0.305: E$91.2 34.03,86.31 32.38,84.66 24.88,84.66 | 22.85,84.66 E$89.P$2 24.88,84.66 | E$92.1 24.88,84.66
S$85
  Top 0.305: E$94.P$2 26.16,71.75 23.11,71.75 E$93.P$1
  Bottom 0.305: E$94.P$2 E$94.P$1
S$86
  Top 0.305: E$94.P$3 32.64,73.66 E$95.1
S$87
  Top 0.305: E$93.P$3 24.26,77.47 E$96.2 26.54,76.2 E$94.P$5
S$88
  Top 0.305: E$95.2 33.91,76.58 32.26,74.93 24.76,74.93 | 22.73,74.93 E$93.P$2 24.76,74.93 | E$96.1 24.76,74.93
S$89
  Top 0.305: E$98.P$2 41.15,71.75 38.1,71.75 E$97.P$1
  Bottom 0.305: E$98.P$2 E$98.P$1
S$90
  Top 0.305: E$98.P$3 47.62,73.66 E$99.1
S$91
  Top 0.305: E$97.P$3 39.24,77.47 E$100.2 41.53,76.2 E$98.P$5
S$92
  Top 0.305: E$99.2 48.89,76.58 47.24,74.93 39.75,74.93 | 37.72,74.93 E$97.P$2 39.75,74.93 | E$100.1 39.75,74.93
S$93
  Top 0.305: E$102.P$2 56.39,71.75 53.34,71.75 E$101.P$1
  Bottom 0.305: E$102.P$2 E$102.P$1
S$94
  Top 0.305: E$102.P$3 62.86,73.66 E$103.1
S$95
  Top 0.305: E$101.P$3 54.48,77.47 E$104.2 56.77,76.2 E$102.P$5
S$96
  Top 0.305: E$103.2 64.13,76.58 62.48,74.93 54.99,74.93 | 52.96,74.93 E$101.P$2 54.99,74.93 | E$104.1 54.99,74.93
S$97
  Top 0.305: E$106.P$2 105.11,81.26 102.06,81.26 E$105.P$1
  Bottom 0.305: E$106.P$2 E$106.P$1
S$98
  Top 0.305: E$106.P$3 111.59,83.16 E$107.1
S$99
  Top 0.305: E$105.P$3 103.21,86.97 E$108.2 105.49,85.7 E$106.P$5
S$100
  Top 0.305: E$107.2 112.86,86.08 111.21,84.43 103.72,84.43 | 101.68,84.43 E$105.P$2 103.72,84.43 | E$108.1 103.72,84.43
S$101
  Top 0.305: E$110.P$2 89.15,81.39 86.1,81.39 E$109.P$1
  Bottom 0.305: E$110.P$2 E$110.P$1
S$102
  Top 0.305: E$110.P$3 95.62,83.29 E$111.1
S$103
  Top 0.305: E$109.P$3 87.24,87.1 E$112.2 89.53,85.83 E$110.P$5
S$104
  Top 0.305: E$111.2 96.89,86.22 95.24,84.56 87.75,84.56 | 85.72,84.56 E$109.P$2 87.75,84.56 | E$112.1 87.75,84.56
S$105
  Top 0.305: E$114.P$2 73.53,81.39 70.48,81.39 E$113.P$1
  Bottom 0.305: E$114.P$2 E$114.P$1
S$106
  Top 0.305: E$114.P$3 80,83.29 E$115.1
S$107
  Top 0.305: E$113.P$3 71.62,87.1 E$116.2 73.91,85.83 E$114.P$5
S$108
  Top 0.305: E$115.2 81.27,86.22 79.62,84.56 72.13,84.56 | 70.1,84.56 E$113.P$2 72.13,84.56 | E$116.1 72.13,84.56
S$109
  Top 0.305: E$29.P$2 77.9,64.75 77.9,62.08 86.41,62.08 88.57,64.24 90.96,64.24 E$34.P$2 93.5,61.7 99.8,61.7 102.39,59.11 102.39,57.38 103.68,56.08 103.71,56.11 112.7,56.11 | E$9.P$3 72.84,67.69 58.34,67.69 56.9,66.24 56.26,66.24 53.31,63.3 3V3.2 53.31,62.13 51.64,60.45 47.73,60.45 | E$36.P$2 E$36.P$1 42.8,48.89 42.8,53.47 E$1.P$50 47.75,60.43 47.73,60.45 | 47.73,60.45 44.5,60.45 E$64.+ 42.04,62.92 E$63.1 41.3,66.04 E$35.P$6 | E$32.P$2 50.98,12.72 E$75.1 37.64,12.17 E$4.P$2 | 112.7,56.11 E$59.1 | E$117.2 112.75,56.06 112.7,56.11
  Bottom 0.305: E$58.1 111.4,26.11 111.4,53.9 E$117.2 | E$29.P$2 77.42,67.77 75.33,67.77 E$9.P$3 | E$35.P$6 38.84,64.75 36.52,64.75 34.29,62.51 34.29,55.3 27.15,48.16 27.15,29.74 E$24.P$3 E$24.P$2 32.84,21.51 32.84,16.97 E$4.P$2 | E$37.P$2 90.88,14.43 88.32,14.43 86.97,15.77 81.64,15.77 79.17,13.31 E$32.P$2
S$113  (via drill 0.6)
  Top 0.305: E$67.P$2 v44.03,22.73
  Bottom 0.305: v44.03,22.73 60.58,22.73 E$1.P$7

## Text on the board
Bottom: RESAJ | RESAJ | PUMATRÓN | R | L | RESAJ